# Altium PCB PCB1.PcbDoc
Units mil, origin at the board's own origin, x right, y up, seen from the top; angles counter-clockwise.
Board outline 3025 x 790 mil, 2 copper layers (Top Layer, Bottom Layer); 25 components, 13 nets, 69 pads, 10 vias.
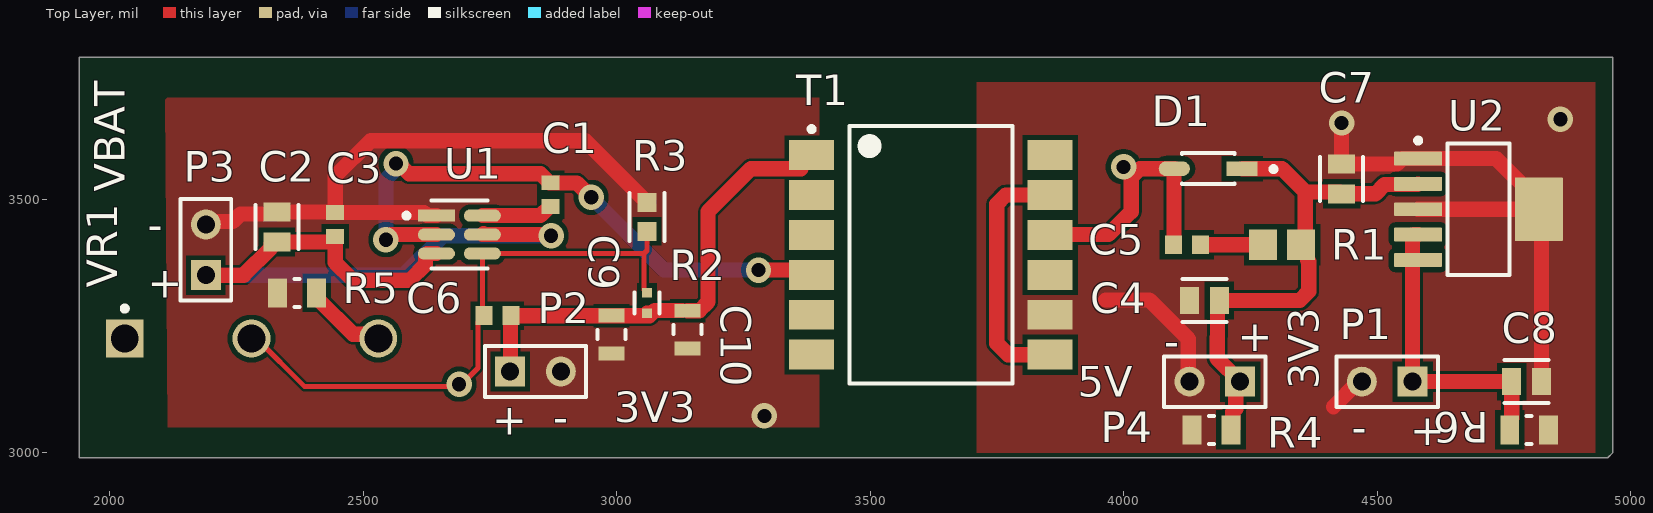
[diagram p0: Top Layer view]
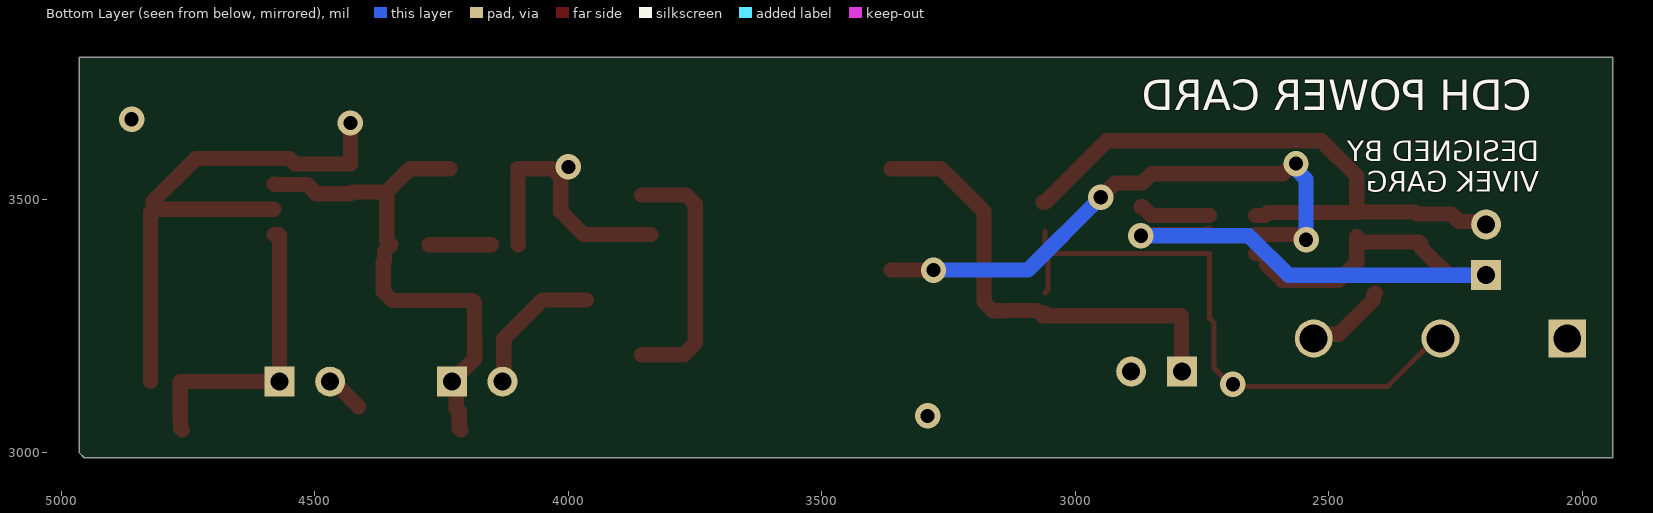
[diagram p1: Bottom Layer view, seen from below]
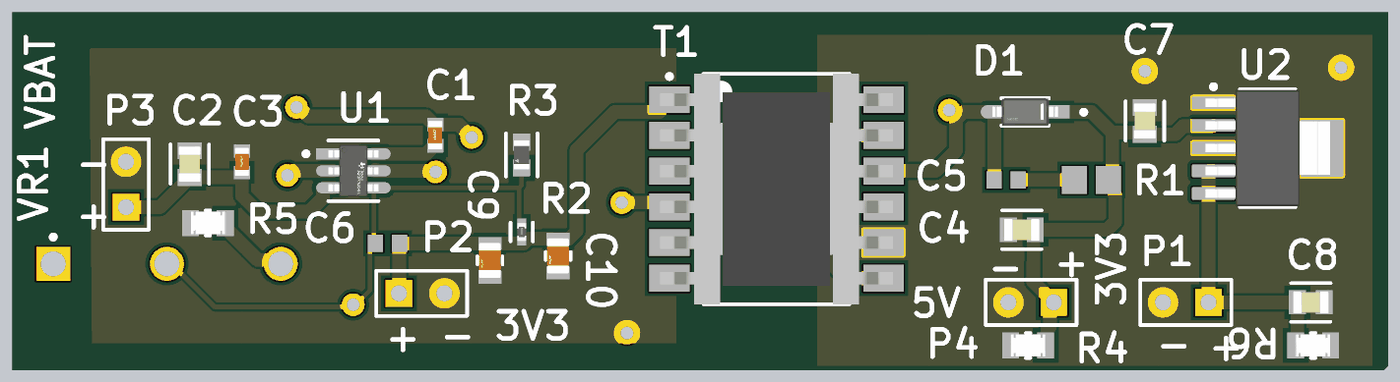
[diagram p2: 3D render of the assembled board from above, using the file's embedded part models]

## Layer stack, top to bottom
Top Solder: solder mask 0.4, Solder Resist, Dk 3.5
Top Layer: signal copper 1.4
Dielectric 1: dielectric 12.6, FR-4, Dk 4.8
Bottom Layer: signal copper 1.4
Bottom Solder: solder mask 0.4, Solder Resist, Dk 3.5

## Board outline
2020.86,2990 1940,2990 1940,3780 4965,3780 4965,3000 4955,2990

## Design rules (kind name [scope] priority, off if disabled: settings)
Clearance [All] p1: gap=10 ignorepadtopadclearanceinfootprint=FALSE except(0: Arc-Hole Track-Hole SMDPad-Hole THPad-Hole Via-Hole Fill-Hole Poly-Hole Region-Hole Text-Hole; 5: Arc-Arc Arc-Track Arc-SMDPad Arc-THPad Arc-Via Arc-Fill Arc-Poly Arc-Region Arc-Text Track-Track Track-SMDPad Track-THPad Track-Via Track-Fill Track-Poly Track-Region Track-Text)
PlaneConnect [All] p1: planeconnectstyle=Direct reliefexpansion=20 reliefentries=4 reliefconductorwidth=10 reliefairgap=10
PolygonConnect [All] p1: connectstyle=Direct reliefconductorwidth=10 reliefentries=4 polygonreliefangle="90 Angle" airgapwidth=10
RoomDefinition Sheet1 [InComponentClass('Sheet1')] p1: confinementstyle=ConfineIn formatcopy=TRUE lockcomponents=FALSE outline 1740,2800 5350,2800 5350,4085 1740,4085
RoutingVias [All] p1: holewidth=28 width=50 viastyle="Through Hole" minholewidth=28 minwidth=50 maxholewidth=28 maxwidth=50
SolderMaskExpansion [All] p1: expansion=4 istentingtop=FALSE
Width [All] p1: maxlimit=30 minlimit=10 preferedwidth=10
29 further rules are at their usual default settings.

## Components (designator, comment, footprint, x,y, rotation, side; value= is the part's Value field where it differs from the comment)
C1 "C0603C104K5RECAUTO" FP-C0603C104K5RECAUTO-MFG 2870,3508.62 r90 top
C2 "C0805C106K8PACTU" FP-C0805C-DG-MFG 2330,3445 r90 top value=10uF
C3 "C0603C104K5RECAUTO" FP-C0603C104K5RECAUTO-MFG 2445,3450 r90 top
C4 "C0805C106K8PACTU" FP-C0805C-DG-MFG 4159.53,3300 r180 top value=10uF
C5 "GRM1885C1H101JA01D" CAPC1608X90X35NL10T15 4125,3410 r0 top
C6 "GRM1885C1H101JA01D" CAPC1608X90X35NL10T15 2765,3270 r0 top
C7 "C0805C106K8PACTU" FP-C0805C-DG-MFG 4430,3540 r90 top value=10uF
C8 "C0805C106K8PACTU" FP-C0805C-DG-MFG 4795,3140 r0 top value=10uF
C9 "GRM21BR60J226ME39L" FP-GRM21B-0_15-MFG 2990,3232.6 r270 top
C10 "GRM21BR60J226ME39L" FP-GRM21B-0_15-MFG 3140,3242.4 r270 top
D1 "1N5711W-7-F" FP-SOD123-IPC_A 4166.94,3560 r180 top
P1 "Header 2" HDR1X2 4570,3140 r180 top
P2 "Header 2" HDR1X2 2790,3160 r0 top
P3 "Header 2" HDR1X2 2190,3350 r90 top
P4 "Header 2" HDR1X2 4230,3140 r180 top
R1 "ERA6AEB101V" RESC2013X60X40ML20T25 4312.6,3410 r0 top
R2 "ERJ-2RKF1003X" FP-ERJ2RK-MFG 3060,3295.18 r270 top
R3 "CRCW060322K0FKEAHP" FP-CRCW0603-HPe3-IPC_B 3060,3465 r270 top
R4 "CRCW080510K0FKEA" FP-CRCW0805-e3-MFG 4173.39,3045 r0 top
R5 "CRCW080510K0FKEA" FP-CRCW0805-e3-MFG 2370,3315 r0 top
R6 "CRCW080510K0FKEA" FP-CRCW0805-e3-MFG 4800,3045 r180 top
T1 "749196121" ER11_5 3620,3390 r0 top
U1 "TPS54308DDCT" FP-DDC0006A-IPC_A 2690,3430 r0 top
U2 "TPS7A4533DCQR" DCQ0006A_M 4700,3480 r0 top
VR1 "3852A-282-103AL" BOUR-3852A-282-103AL-3_V 2280,3225 r0 top

## Footprints (in the part's own frame and the unit in brackets; to place one, negate y for a bottom-side part, rotate by r counter-clockwise, add the part's x,y. Pads: shape width x height; smd on the part's side, far side on the other; paste and mask are expansions set on the pad)
BOUR-3852A-282-103AL-3_V [mm] "TH, 3-Leads, Body 19.81x19.05mm, Pitch 6.35mm"
  rect 1.9x1.9 hole 1.4: 1(-6.35,0)
  round 1.9 hole 1.4: 2(0,0) 3(6.35,0)
  silkscreen extent -6.47,1.38 -6.22,1.62, body extent -9.52,-19.11 9.52,0.7, height 19.05
CAPC1608X90X35NL10T15 [mm] "Chip Capacitor, 2-Leads, Body 1.60x0.80mm, IPC Medium Density"
  rect 0.85x0.95 smd: 1(-0.675,0) 2(0.675,0)
  body extent -0.85,-0.45 0.85,0.45, height 0.9
DCQ0006A_M [mm] "SOT223, 6-Leads, Body 6.55x3.55mm, Pitch 1.27mm, IPC Low Density"
  rrect14% 2.4x0.7 smd: 1(-3.025,2.54) 2(-3.025,1.27) 3(-3.025,0) 4(-3.025,-1.27) 5(-3.025,-2.54)
  rrect4% 2.4x3.2 smd: 6(3.025,0)
  silkscreen extent -3.15,-3.3 1.55,3.56, body extent -3.48,-3.25 3.48,3.25, height 1.64
ER11_5 [mm] "SMD, 12-Leads, Body 12.9x9.2mm (max), Pitch 2.00mm, IPC Medium Density"
  rect 2.25x1.5 smd: 1(-5.975,5) 2(-5.975,3) 3(-5.975,1) 4(-5.975,-1) 5(-5.975,-3) 6(-5.975,-5) 7(5.975,-5) 8(5.975,-3) 9(5.975,-1) 10(5.975,1) 11(5.975,3) 12(5.975,5)
  silkscreen extent -6.1,-6.45 4.08,6.45, body extent -6.5,-6.45 6.5,6.45, height 6.15
FP-C0603C104K5RECAUTO-MFG [mm]
  rect 0.75x0.9 smd paste+0 mask+0: 1(-0.6,0) 2(0.6,0)
  body extent -1.2,-0.6 1.2,0.6, height 0.25
FP-C0805C-DG-MFG [mm]
  rect 0.95x1.35 smd paste+0 mask+0: 1(-0.75,0) 2(0.75,0)
  silkscreen extent -1.11,-1.08 1.1,1.07, body extent -1.4,-0.85 1.4,0.85, height 0.25
FP-CRCW0603-HPe3-IPC_B [mil]
  rect 37.72x37.88 smd paste+0 mask+0: 1(-28.62,0) 2(28.62,0)
  silkscreen extent -47,-35 47,35, body extent -57,-29 57,29, height 10
FP-CRCW0805-e3-MFG [mm]
  rect 0.95x1.45 smd paste+0 mask+0: 1(-0.975,0) 2(0.975,0)
  silkscreen extent -0.13,-0.7 0.13,0.7, body extent -1.55,-0.82 1.55,0.82, height 0.25
FP-DDC0006A-IPC_A [mm]
  rect 1.854x0.612 smd paste+0 mask+0: 1(-1.15,0.95)
  rrect100% 1.854x0.612 smd paste+0 mask+0: 2(-1.15,0) 3(-1.15,-0.95) 4(1.15,-0.95) 5(1.15,0) 6(1.15,0.95)
  silkscreen extent -2.77,-1.7 1.4,1.7, body extent -2.58,-1.95 2.58,1.95, height 0.25
FP-ERJ2RK-MFG [mm]
  rect 0.475x0.5 smd paste+0 mask+0: 1(-0.513,0) 2(0.513,0)
  silkscreen extent -0.53,-0.63 0.53,0.63, body extent -0.85,-0.38 0.85,0.38, height 0.25
FP-GRM21B-0_15-MFG [mm]
  rect 0.7x1.3 smd paste+0 mask+0: 1(-0.95,0) 2(0.95,0)
  silkscreen extent -0.23,-0.7 0.23,0.7, body extent -1.4,-0.8 1.4,0.8, height 0.25
FP-SOD123-IPC_A [mil]
  rect 61.32x29.23 smd paste+0 mask+0: 1(-66.94,0)
  rrect100% 61.32x29.23 smd paste+0 mask+0: 2(66.94,0)
  silkscreen extent -134,-31 52,31, body extent -117,-50 117,50, height 10
HDR1X2 [mm] "Connector; Header; 2 Position"
  rect 1.5x1.5 hole 0.9: 1(0,0)
  round 1.5 hole 0.9: 2(2.54,0)
  silkscreen extent -1.27,-1.27 3.81,1.27
RESC2013X60X40ML20T25 [mm] "Chip Resistor, 2-Leads, Body 2.00x1.25mm, IPC Low Density"
  rect 1.4x1.55 smd: 1(-0.95,0) 2(0.95,0)
  body extent -1.1,-0.72 1.1,0.72, height 0.6

## Part data
C1 C3: library part CMP-03020-034675-1, "CAP CER 0.10UF 50V X7R 0603", Capacitance=100nF, Case Code (Imperial)=0603, Case Code (Metric)=1608, Max Operating Temperature=125°C, Min Operating Temperature=-55°C, Ratings=AEC-Q200, Tolerance=10%, Voltage Rating=50V, Case/Package=0603, Interface=SPI, Mount="Surface Mount", Number of A/D Converters=1, Number of Bits=16, Packaging="Tape and Reel", RoHS Compliant=Yes, Sampling Rate=4000S/s
C2 C4 C7 C8: library part CMP-2007-03243-2, "CAP CER 10UF 10V X5R 0805", 3DS Part Number=220-00001, Capacitance=10uF, Manufacturer=Kemet, Package=C0805C-DG, Temperature="-55°C to +85°C", Temperature Characteristic=X5R, Temperature Coefficient=15%, Temperature Range High=+85°C, Temperature Range Low=-55°C, Tolerance=10%, Voltage=10V, Automotive=No, Category=Cap, ComponentLink2Description=Datasheet, ComponentLink2URL=https://content.kemet.com/datasheets/KEM_C1006_X5R_SMD.pdf, Device Class L1="Passive Components", Device Class L2=Capacitors, Device Class L3="Ceramic Capacitors", Digikey Description="CAP CER 10UF 10V X5R 0805", Height=1.4mm, Ipc Land Pattern Name=CAPC200125X125, Lead Free=Yes, Manufacturer Part Number=C0805C106K8PACTU, Material=Ceramic, Mouser Description="CAP CER 10UF 10V X5R 0805", Octopart=https://octopart.com/c0805c106k8pactu-kemet-98697, RoHS=TRUE, Voltage Rating=10V
C5 C6: library part CMP-2006-02595-1, Manufacturer=Murata, c=100p, Part Number=GRM1885C1H101JA01D
C9 C10: library part CMP-2007-03385-2, "Chip Multilayer Ceramic Capacitors for General Purpose, 0805, 22uF, X5R, 15%, 20%, 6.3V", Capacitance=22uF, Case Code (Imperial)=0805, Case Code (Metric)=2012, Dielectric=X5R, Max Operating Temperature=85°C, Min Operating Temperature=-55°C, Package Quantity=1, Tolerance=20%, Voltage=6.3V, Case/Package=0805, Depth=1.25mm, Height=1.25mm, Lead Free="Lead Free", Length=2mm, Material=Ceramic, Mount="Surface Mount", Packaging="Tape and Reel", Radiation Hardening=No, REACH SVHC="No SVHC", Termination=SMD/SMT, Thickness=0.053inch, Voltage Rating=6.3V, Voltage Rating (DC)=6.3V, Width=0.049inch
D1: library part CMP-12790-000071-1, "DIODE SCHOTTKY 70V 333MW SOD123", Capacitance=2pF, Current Rating=15mA, Forward Voltage=1V, Max Forward Surge Current (Ifsm)=1mA, Max Operating Temperature=125°C, Max Power Dissipation=333mW, Max Repetitive Reverse Voltage (Vrrm)=70V, Min Operating Temperature=-55°C, Package Quantity=3000, Peak Reverse Current=200nA, Contact Plating=Tin, Element Configuration=Single, Forward Current=15mA, Height=1.25mm, Lead Free="Lead Free", Length=2.85mm, Max Current Rating=15mA, Mount="Surface Mount", Number of Pins=2, Output Current=15mA, Packaging="Tape and Reel", Polarity=Standard, Power Dissipation=333mW, Power Rating=333mW, Radiation Hardening=No, REACH SVHC="No SVHC", Reverse Recovery Time=1ns, Termination=SMD/SMT, Voltage Rating (DC)=70V, Weight=0.000353oz, Width=1.7mm
P1 P2 P3 P4: "Header, 2-Pin", LatestRevisionDate=17-Jul-2002, LatestRevisionNote="Re-released for DXP Platform.", Publisher="Altium Limited"
R1: library part CMP-2001-00580-1, Manufacturer=Panasonic, Part Number=ERA6AEB101V, r=100
R2: library part CMP-2002-00608-4, "RES SMD 100K OHM 1% 1/10W 0402", Case Code (Imperial)=0402, Case Code (Metric)=1005, Max Operating Temperature=155°C, Max Power Dissipation=100mW, Min Operating Temperature=-55°C, Package Quantity=1, Resistance=100kR, Temperature Coefficient=100ppm/°C, Tolerance=1%, Voltage Rating=50V, Case/Package=0402, Composition="Thick Film", Contact Plating=Tin, Depth=0.5mm, Features="Automotive AEC-Q200", Height=0.35mm, Lead Free="Lead Free", Length=1mm, Military Standard=Not, Mount="Surface Mount", Number of Pins=2, Number of Terminations=2, Packaging="Tape and Reel", Power Rating=100mW, Radiation Hardening=No, REACH SVHC="No SVHC", Termination=SMD/SMT, Voltage Rating (DC)=50V, Width=0.5mm
R3: library part CMP-02407-004495-1, "RES Thick Film, 22kΩ, 1%, 0.33W, 100ppm/°C, 0603", Case Code (Imperial)=0603, Case Code (Metric)=1608, Max Operating Temperature=155°C, Max Power Dissipation=250mW, Min Operating Temperature=-55°C, Package Quantity=5000, Resistance=22kR, Temperature Coefficient=100ppm/°C, Tolerance=1%, Voltage Rating=75V, Case/Package=0603, Composition="Thick Film", Contact Plating=Tin, Depth=0.85mm, Features="Automotive AEC-Q200", Height=0.022inch, Lead Free="Lead Free", Length=1.6mm, Military Standard=Not, Mount="Surface Mount", Number of Terminations=2, Packaging="Tape and Reel", Power Rating=250mW, Radiation Hardening=No, Termination=SMD/SMT, Voltage Rating (DC)=75V, Width=0.033inch
R4 R5 R6: library part CMP-2001-04908-2, "RES Thick Film, 10kΩ, 1%, 0.125W, 100ppm/°C, 0805", Case Code (Imperial)=0805, Case Code (Metric)=2012, Max Operating Temperature=155°C, Min Operating Temperature=-55°C, Package Quantity=5000, Power Rating=125mW, Resistance=10kR, Temperature Coefficient=100ppm/°C, Tolerance=1%, Voltage Rating=150V, Case/Package=0805, Composition="Thick Film", Contact Plating=Tin, Depth=1.25mm, Height=0.45mm, Lead Free="Lead Free", Length=2mm, Military Standard=Not, Packaging="Tape and Reel", Radiation Hardening=No, Termination=SMD/SMT, Voltage Rating (DC)=150V, Weight=0.000194oz, Width=1.25mm
T1: library part CMP-1376-00020-1, "Flexible Transformer for DC/DC Converter WE-FLEX, L=14.7µH", Manufacturer="Wuerth Elektronik", ComponentLink1Description="Manufacturer URL", ComponentLink1URL=http://www.we-online.com, ComponentLink2Description=Datasheet, ComponentLink2URL=http://www.we-online.de/katalog/media/pdf/749196121.pdf, Lbase=14.7ÂµH, PackageReference=ER11_5, PartNumber=749196121
U1: library part CMP-04918-000241-1, "IC REG BUCK ADJ 3A TSOT23-6", Case/Package=SOT-23-6, Max Input Voltage=28V, Max Operating Temperature=125°C, Max Output Voltage=26V, Min Input Voltage=4.5V, Min Operating Temperature=-40°C, Min Output Voltage=1V, Output Current=3A, Switching Frequency=350kHz, Mount="Surface Mount", Number of Outputs=1, Output Configuration=Positive, Output Type=Adjustable, Packaging="Tape and Reel", RoHS Compliant=Yes, Synchronous Rectifier=Yes
U2: library part CMP-0395-00360-2, "Single Output Fast Transient Response LDO, 1.5 A, Fixed 3.3 V Output, 2.1 to 20 V Input, 6-pin SOT-223 (DCQ), -40 to 125 degC, Green (RoHS & no Sb/Br)", Manufacturer="Texas Instruments", Accuracy(%)=1, ComponentLink1Description="Manufacturer URL", ComponentLink1URL=http://www.ti.com/, ComponentLink2Description=Datasheet, ComponentLink2URL=http://www.ti.com/general/docs/lit/getliterature.tsp?genericPartNumber=TPS7A4533&fileType=pdf, ComponentLink3Description="Package Specification", ComponentLink3URL=http://www.ti.com/litv/pdf/mpds098c, DatasheetVersion=SLVS720D, Eco-Plan="Green (RoHS & no Sb/Br)", Fixed Output Options(V)=3.3, Iout(Max)(A)=1.5, Iq(Typ)(mA)=1, Mounting Technology="Surface Mount", PackageDescription="6-Pin Plastic Small Outline, Body 3.5 x 6.5 mm, Pitch 1.27 mm", PackageReference=DCQ0006A, PackageVersion=4202109/D, PartNumber=TPS7A4533DCQR, SubFamily="Single Channel LDO", Vdo(Typ)(mV)=300, Vin(Max)(V)=20, Vin(Min)(V)=2.1, Vout Adj(Max)(V)=3.3, Vout Adj(Min)(V)=3.3
VR1: library part CMP-2000-05079-1, "Diameter Panel Control, 10 KOhm, +/- 10%, 2 W, -1 to 125 degC, 3-Pin THD, RoHS, Bulk", Manufacturer=Bourns, Power (Watts)=2W, Resistance (Ohms)=10k, Resistive Material=Cermet, Standard Package=45, Temperature Coefficient=±150ppm/degC, Tolerance=±10%, Actuator Diameter="0.250\"(6.35mm)", Actuator Length="0.875\"(22.23mm)", Actuator Type=Slotted, Associated Product="36-8560-ND / -KNOBINSTRUMW/DIALRND.9\"DIA / 36-8555-ND / -KNOBINSTRUMSKIRTEDRND.7\"DIA / 36-8556-ND / -KNOBINSTRUMSKIRTEDRND.9\"DIA / 36-8565-ND / -KNOBINSTRUMDBLBARRND.7\"DIA / 36-8566-ND / -KNOBINSTRUMDBLBARRND.9\"DIA / 36-8568-ND / -KNOBINSTRUMSGLBARRND.7\"DIA / 36-8569-ND / -KNOBINSTRUMSGLBARRND.9\"DIA / 36-8559-ND / -KNOBINSTRUMW/DIALRND.7\"DIA / 226-1006-ND / -KNOBBLKGLOSS.75\"DIA.250\"SHAFT / 226-1007-ND / -KNOBBLKGLOSS.925\"DIA.250\"SHAFT / 226-1011-ND / -KNOBBLKGLOS", Built in Switch=None, Bushing Thread=3/8-32, Catalog Drawings="3852SeriesSide1 /  / 3852SeriesSide2", Category=Potentiometers,VariableResistors, Datasheet URL=https://datasheet.ciiva.com/11831/0900766b80f93b4b-11831016.pdf, Datasheet Version=Sep-14, Family=RotaryPotentiometers,Rheostats, Manufacturer URL=http://www.bourns.com/, Mounting Type=PanelMount, Number of Gangs=1, Number of Turns=1, Online Catalog=3852and3856Series, Other Names=3852A282103AL, Packaging=Bulk, PCN Design/Specification=PBTResinJun/2011, PCN Other=MultipleChanges01/Dec/2012, RoHS Information=3852A-LMaterialDeclaration, Rotation=280deg, Series=3852, Taper=Linear, Termination Style=SolderLug

## Via types
v1: diameter 50, hole 28, Top Layer to Bottom Layer, 10 vias

## Nets (pads, with @x,y where several pads share a name; then routed paths per layer and width w, separated by ;. In a path a pad name is that pad's centre, name@x,y a point inside that pad or via, vN(x,y) a via of type N, cw(c..) or ccw(c..) an arc to the next point about the centre after c; other vN are vias at no path point)
3V3: C6.2 C9.1 C10.1 P2.1 R2.2 T1.1 | length 901.8
  Top Layer w30: P2.1 2790.79,3160.79 2790.79,3269.21 C6.2 C9.1 R2.2@3060,3270 ; R2.2 R2.2@3060,3270 ; C10.1@3129.41,3280.23 3075.17,3280.23 3064.94,3270 R2.2@3060,3270 ; C10.1 3162.99,3279.8 3180.56,3297.38 3180.56,3475.56 3265,3560 T1.1@3363.62,3560
3V3_ISO: C8.1 P1.1 R6.2 U2.4 U2.5 | length 592.3
  Top Layer w30: U2.4 4571.22,3430 4570,3428.78 P1.1 C8.1 4765.47,3068.43 4765.31,3068.27 4765.31,3048.7 R6.2
5V_ISO: C4.1 C7.1 D1.1 P4.1 R1.2 R4.2 U2.2 | length 1048.4
  Top Layer w30: R4.2 4215.47,3048.7 4215.47,3080.4 4221.19,3086.12 4221.19,3131.19 P4.1 4184.53,3185.47 4184.53,3227.6 4185.35,3228.43 4185.35,3296.3 C4.1 4347.43,3300 4365,3317.57 4365,3376.91 4362.56,3379.36 4362.56,3397.44 R1.2 4358.43,3418.43 4358.43,3514.17 ; D1.1 4312.6,3560 4358.43,3514.17 ; U2.2 4579.69,3528.78 4514.88,3528.78 4496.57,3510.47 C7.1 4426.3,3514.17 4358.43,3514.17
FB: C6.1 R2.1 R3.2 U1.4 VR1.2 | length 1175.7
  Top Layer w10: VR1.2 2290,3225 2385,3130 2690,3130 2726.69,3166.69 2726.69,3256.3 2735.29,3264.89 U1.4 3054.14,3392.6 ; R2.1 3059.51,3315.36 3055.16,3319.71 3055.16,3320.2 3054.14,3321.22 3054.14,3392.6 ; R3.2 3060,3398.46 3054.14,3392.6
  other v1: 2689.45,3134.88
GND: C2.2 C3.2 C9.2 C10.2 P2.2 P3.2 R3.1 R5.1 U1.1 | length 1237.2
  Top Layer w30: P3.2 2195.56,3455.56 2243.16,3455.56 2258.43,3470.83 2326.3,3470.83 C2.2 2441.61,3474.53 2442.52,3473.62 C3.2@2444.76,3473.62 ; U1.1 2626.16,3467.4 2619.94,3473.62 C3.2 C3.2@2444.76,3473.62 ; R3.1@3063.62,3493.62 R3.1 3059.92,3493.62 2938.54,3615 2515,3615 2445,3545 2445,3473.86 C3.2@2444.76,3473.62
  other v1: 3291.49,3072.39
GND_ISO: C4.2 C7.2 C8.2 P1.2 P4.2 R4.1 R6.1 T1.8 U2.1 U2.3 U2.6 | length 1461.1
  Top Layer w30: 3965,3301.1 3991.1,3301.1 4050.81,3301.1 4127.74,3224.18 4127.74,3142.26 P4.2 ; 4414.13,3090.47 4463.66,3140 P1.2 ; v1(4430,3650) C7.2 4539.41,3569.53 4549.88,3580 U2.1 4734.84,3580 4819.09,3495.75 U2.6 ; U2.3 U2.6 ; C8.2 4824.53,3474.57 U2.6
  other v1: 4861.49,3657.39
NetC1_1: C1.1 U1.6 | length 142
  Top Layer w30: U1.6 2849.92,3467.4 2867.52,3485 C1.1
NetC1_2: C1.2 T1.4 U1.2 | length 1147.4
  Top Layer w30: v1(2545,3420) 2555,3430 U1.2 ; v1(2565,3570) 2570.41,3570 2590.41,3550 2849.76,3550 2867.52,3532.24 C1.2 ; C1.2@2870.24,3532.01 2921.61,3532.01 v1(2950,3503.62) ; v1(3280,3360) T1.4@3363.62,3360
  Bottom Layer w30: v1(2545,3420) 2545,3539.18 2565,3559.18 v1(2565,3570) ; v1(2950,3503.62) 3093.62,3360 v1(3280,3360)
NetC5_1: C5.1 D1.2 T1.10 | length 506.5
  Top Layer w30: T1.10@3837.77,3430 3970,3430 4015,3475 4015,3542.43 4032.57,3560 D1.2 4099.6,3560 4099.21,3559.62 4099.21,3410.79 C5.1
  other v1: 4000,3563.62
NetC5_2: C5.2 R1.1 | length 123.6
  Top Layer w30: C5.2 R1.1
NetR5_2: R5.2 VR1.3 | length 164.7
  Top Layer w30: R5.2 2412.09,3311.3 2412.09,3301.46 2479.97,3233.57 2521.43,3233.57 VR1.3
NetT1_7: T1.7 T1.11 | length 502.3
  Top Layer w30: T1.7 3771.85,3193.15 3750,3215 3750,3490.54 3767.57,3508.11 T1.11
VBAT: C2.1 C3.1 P3.1 U1.3 U1.5 | length 1423.3
  Top Layer w30: P3.1 2264.53,3350 2318.43,3403.9 2318.43,3411.77 2322.13,3415.47 C2.1 C3.1@2431.61,3415.47 ; C3.1 2445,3415.47 2445,3375 2480,3340 2592.11,3340 2623.21,3371.09 2623.21,3389.65 2626.16,3392.6 U1.3 ; U1.5 2737.69,3432.4 2740.09,3430 2868.51,3430 v1(2870.91,3427.6)
  Bottom Layer w30: P3.1 2580,3350 2657.6,3427.6 v1(2870.91,3427.6)
pads on no net: T1.2 T1.3 T1.5 T1.6 T1.9 T1.12 VR1.1

## Polygon pours and split planes (outlines as drawn)
GND_ISO on Top Layer "GND_ISO_L01_P003" (solid, pour order 3): 3710,3730 3710,3000 4930,3000 4930,3730
GND on Top Layer "GND_L01_P002" (solid, pour order 2): 2110,3700 3400,3700 3400,3050 2115,3050

## Silkscreen, mask and mechanical layers (free items; w line width, h text height)
Top Overlay:
  text "VBAT" at 2030,3515 h60 r90
  text "-" at 2075,3420.01 h60
  text "+" at 2075,3305 h60
  text "+" at 4225,3200 h60
  text "-" at 4080,3190.01 h60
  text "3V3" at 4385,3125 h60 r90
  text "5V" at 3910,3110 h60
  text "3V3" at 2995,3060 h60
  text "-" at 2875,3040.01 h60
  text "+" at 2755,3035 h60
  text "-" at 4450,3020.01 h60
  text "+" at 4565,3015 h60
Bottom Overlay:
  text "CDH POWER CARD" at 2100,3675 h60
  text "DESIGNED BY  / VIVEK GARG" at 2085,3515 h40